# Altium PCB TMTGP.PcbDoc
Units mil, origin at the board's own origin, x right, y up, seen from the top; angles counter-clockwise.
Board outline 905 x 1625 mil, 2 copper layers (Top Layer, Bottom Layer); 61 components, 55 nets, 267 pads, 27 vias.
Unrouted connection lines stored in the file: 166.
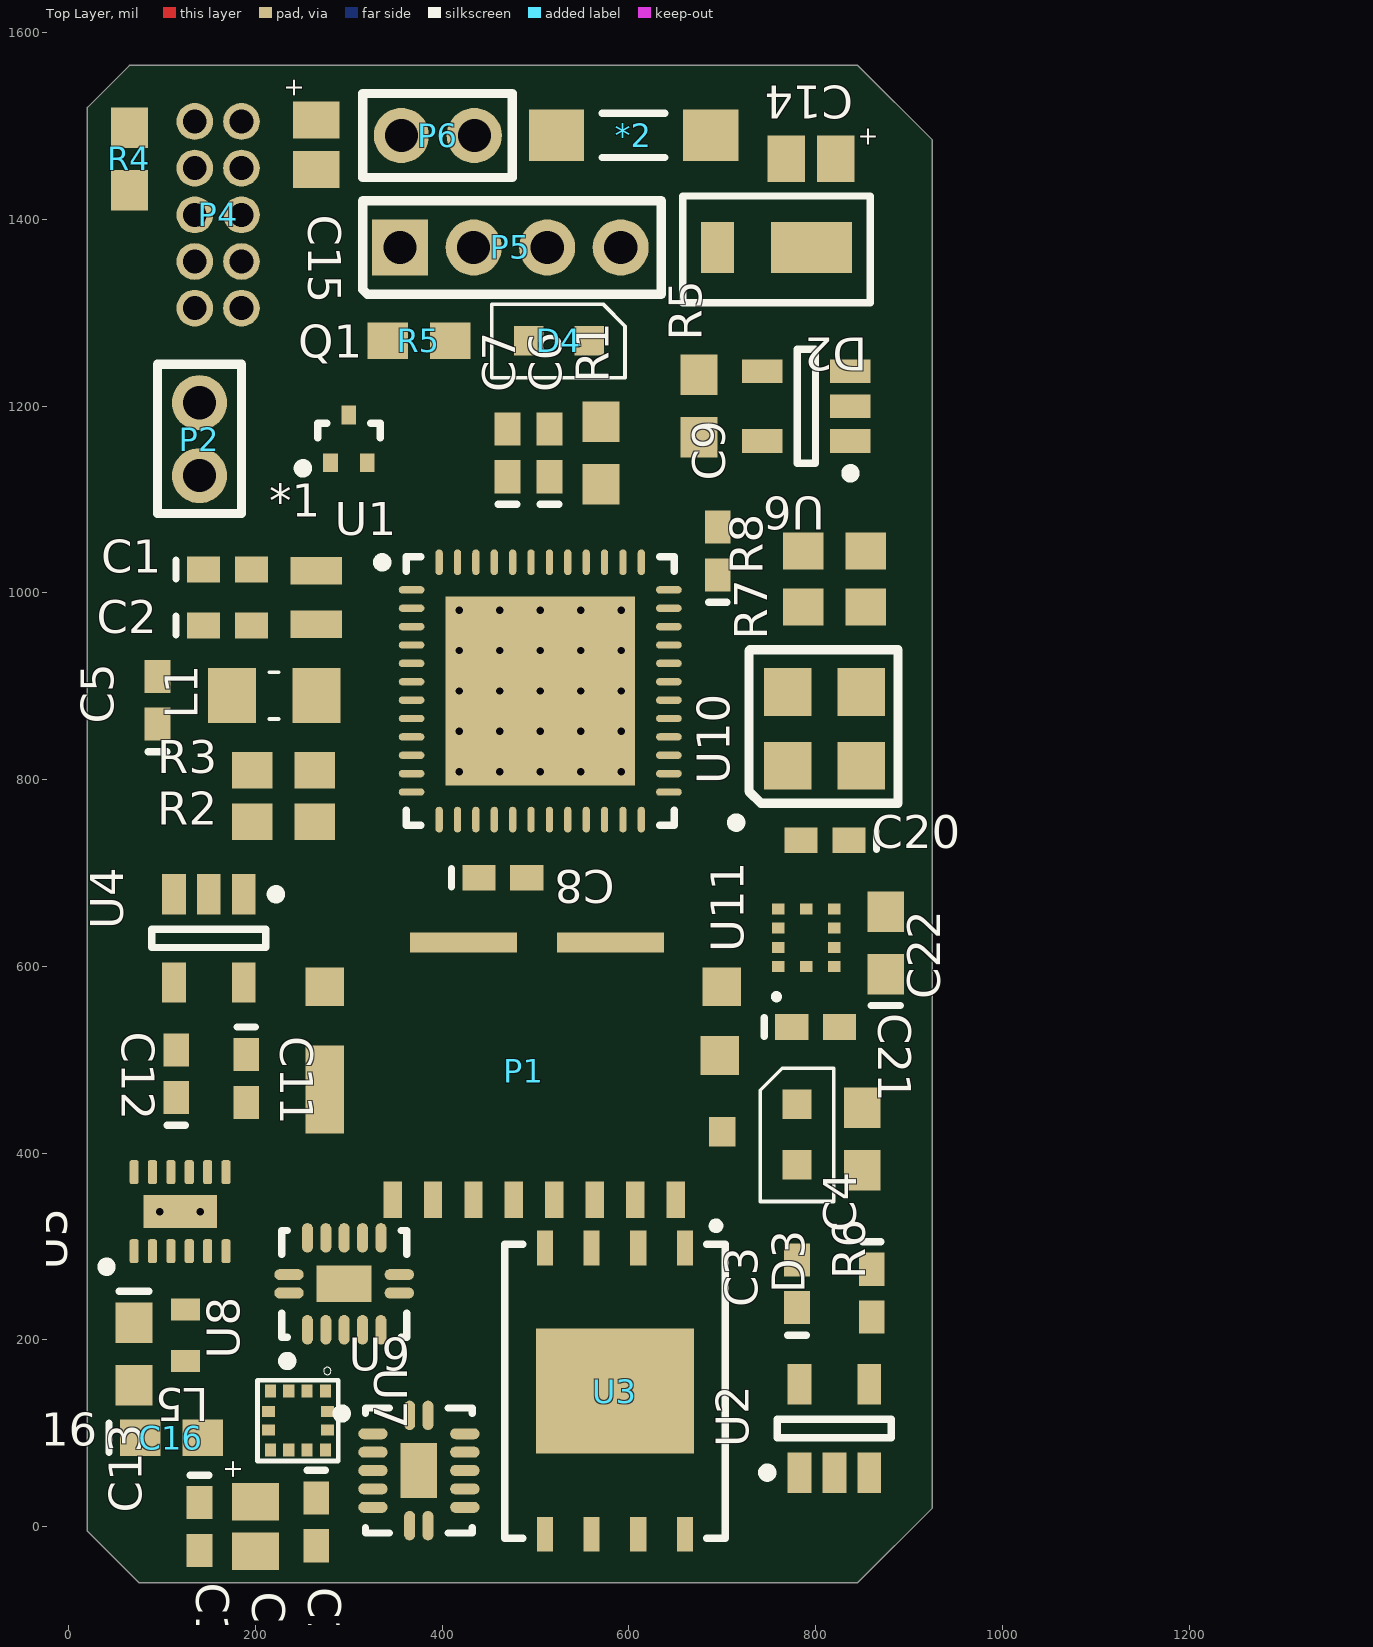
[diagram p0: Top Layer view]
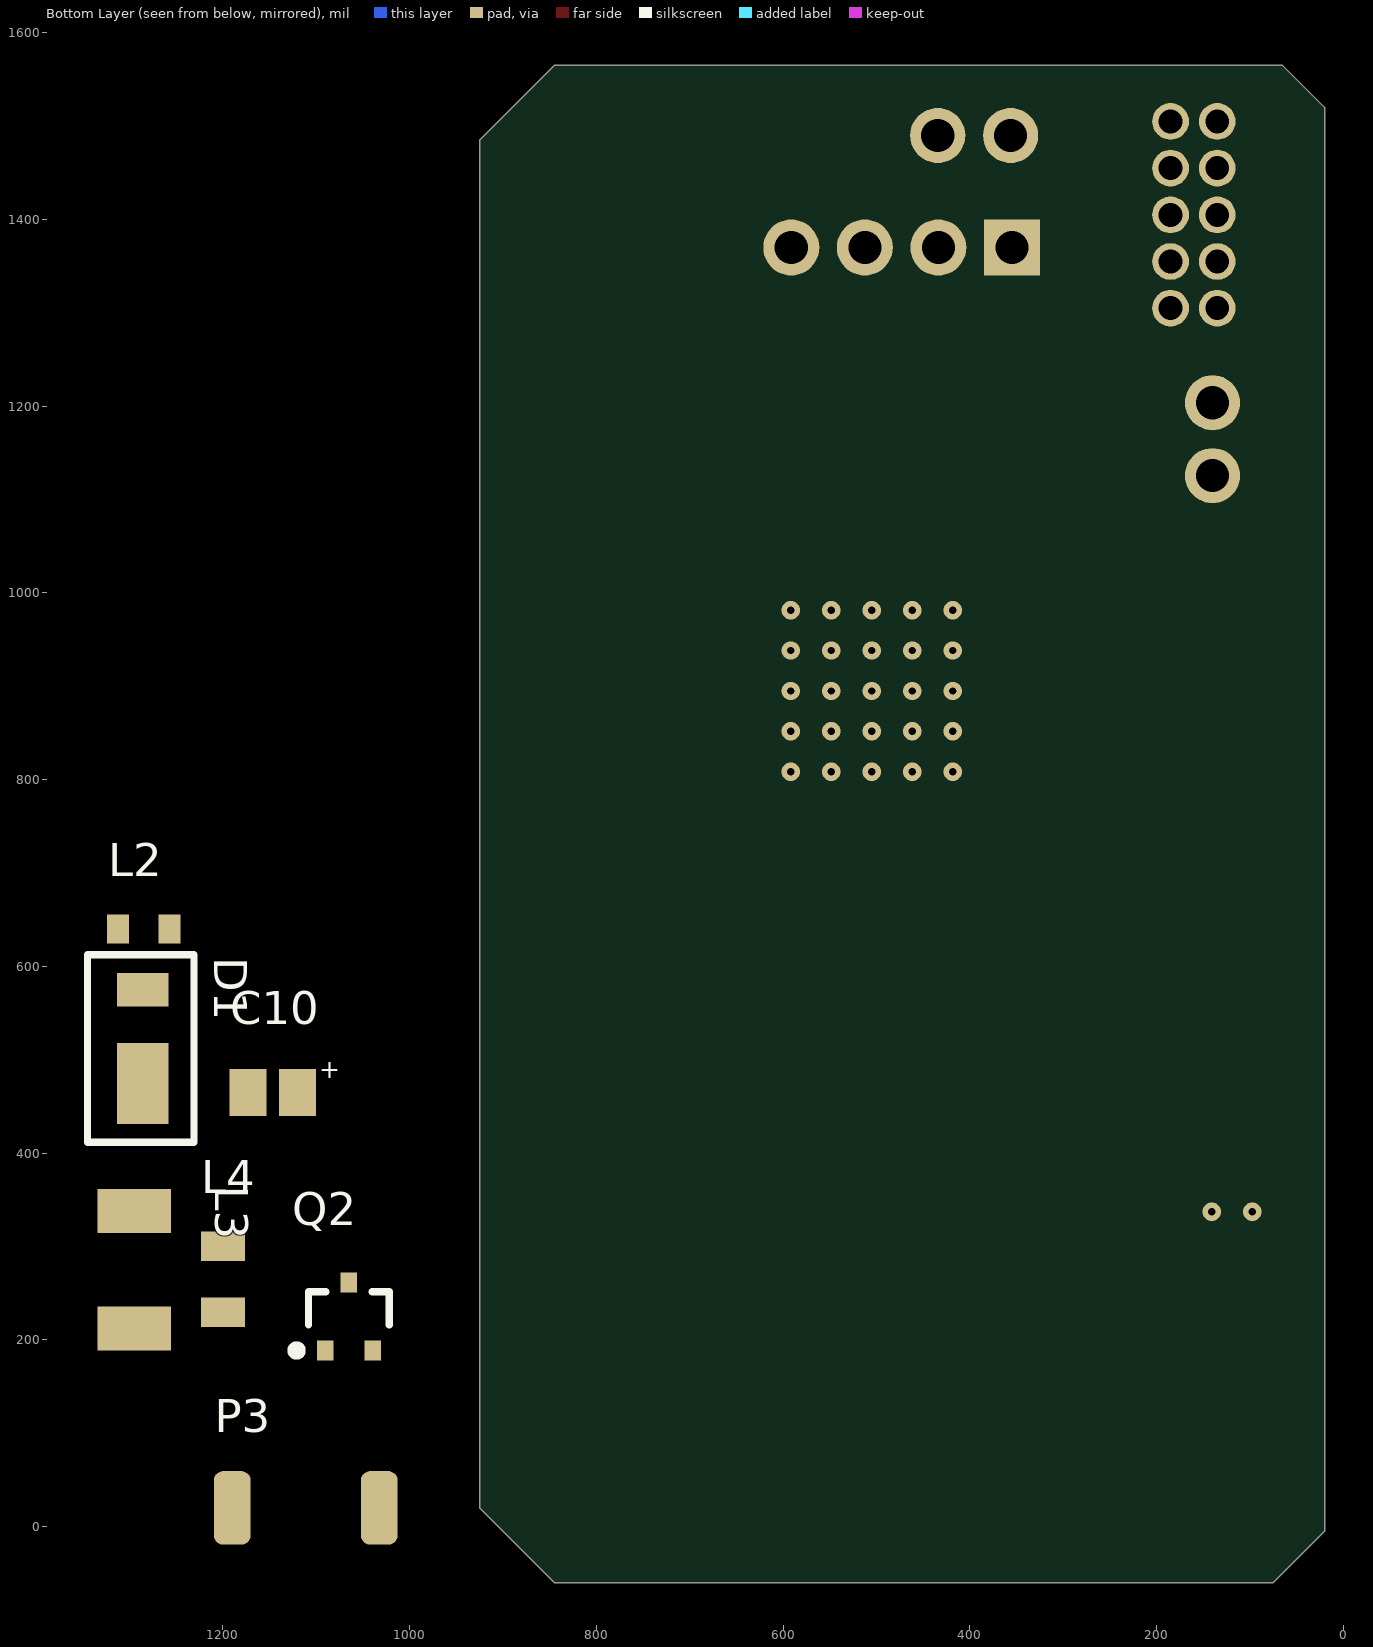
[diagram p1: Bottom Layer view, seen from below]

## Layer stack, top to bottom
Top Solder: solder mask 0.4, Solder Resist, Dk 3.5
Top Layer: signal copper 1.4
Dielectric 1: dielectric 12.6, FR-4, Dk 4.8
Bottom Layer: signal copper 1.4
Bottom Solder: solder mask 0.4, Solder Resist, Dk 3.5

## Board outline
20,-5 20,1520 65,1565 845,1565 925,1485 925,20 845,-60 75,-60

## Design rules (kind name [scope] priority, off if disabled: settings)
Clearance [All] p1: gap=10
PolygonConnect [All] p1: connectstyle=Relief reliefconductorwidth=10 reliefentries=4 polygonreliefangle="90 Angle" airgapwidth=10
RoomDefinition TMTGP_Sensors [InComponentClass('TMTGP_Sensors')] p1: confinementstyle=ConfineIn formatcopy=TRUE lockcomponents=FALSE outline -1180,-2185 820,-2185 820,-1185 -1180,-1185
RoomDefinition TMTGP [InComponentClass('TMTGP')] p2: confinementstyle=ConfineIn formatcopy=TRUE lockcomponents=FALSE outline -1180,-2185 820,-2185 820,-1185 -1180,-1185
RoutingVias [All] p1: holewidth=28 width=50 viastyle="Through Hole" minholewidth=28 minwidth=50 maxholewidth=28 maxwidth=50
SolderMaskExpansion [All] p1: expansion=4
Width [All] p1: maxlimit=10 minlimit=10 preferedwidth=10
29 further rules are at their usual default settings.

## Classes and differential pairs
component class TMTGP_Sensors: C17 C18 C19 C20 C21 C22 R7 R8 U7 U8 U9 U10 U11
component class TMTGP: *1 *2 C1 C2 C3 C4 C5 C6 C7 C8 C9 C10 C11 C12 C13 C14 C15 C16 D1 D2 D3 D4 L1 L2 L3 L4 L5 P1 P2 P3 P4 P5 P6 Q1 Q2 R1 R2 R3 R4 R5 R6 U1 U2 U3 U4 U5 U6

## Components (designator, comment, footprint, x,y, rotation, side; value= is the part's Value field where it differs from the comment)
*1 "XTAL_ABS06" XTAL-ABS06 265,995 r90 top
*2 "Reed_MK24" "Reed MK24-B-3" 605,1490 r0 top
C1 "22.5pF" 0402 170,1025 r0 top
C2 "22.5pF" 0402 170,965 r0 top
C3 "1.0uF" 0402 780,260 r90 top
C4 "10nF" 0402 860,250 r270 top
C5 "0.1uF" 0402 95,885 r90 top
C6 "0.1uF" 0402 515,1150 r90 top
C7 "0.1uF" 0402 470,1150 r90 top
C8 "0.1 uF" 0402 465,695 r0 top
C9 "0.1 uF" 0402 695,1045 r90 top
C10 "47uF" Tant0805 1146.56,465 r180 bottom
C11 "1.0uF" 0402 190,480 r270 top
C12 "10nF" 0402 115,485 r90 top
C13 "C0603" 0603 70,185 r270 top
C14 "1uF" Tant0805 795,1465 r0 top
C15 "1uF" Tant0805 265,1480 r90 top
C16 "C0603" 0603 110,95 r0 top
C17 "100nF" 0402 265,5 r270 top
C18 "10uF" Tant0805 200,0 r90 top
C19 "100nF" 0402 140,0 r270 top
C20 "0.1uF" 0402 810,735 r180 top
C21 "1.0uF" 0402 800,535 r0 top
C22 "C0603" 0603 875,625 r90 top
D1 "Shottky" DFLS130 1286.06,510 r90 bottom
D2 "Shottky" DFLS130 760,1370 r180 top
D3 "LED_0603" Diode0603 780,420 r90 top
D4 "LED_0603" Diode0603 525,1270 r0 top
L1 "300Ohm" "0805 (M2125) Ferrite" 220,890 r180 top
L2 "47uH" "Inductor KLZ1608AHR" 1285,640 r180 bottom
L3 "390uH" Inductor_NLV32T 1295,275 r90 bottom
L4 "22uH" "Inductor MLZ2012M220WT000" 1200,265 r270 bottom
L5 "2.2uH" "Inductor KLZ1608AHR" 125,205 r90 top
P1 "microSD" "Molex microSD" 650,350 r0 top
P2 "HDR_2x1_2mm" HDR_2x1_2mm 140,1125 r0 top
P3 "PIEZO" PIEZO 1190,20 r270 bottom
P4 "Cortex Debug" Header_2x5_50mil 135,1305 r0 top
P5 "HDR_4x1_2mm" Hdr_4x1_2mm 355,1370 r270 top
P6 "HDR_2x1_2mm" HDR_2x1_2mm 435,1490 r90 top
Q1 "DMN5L06TK-7" SOT-523 300,1165 r90 top
Q2 "PMF250XN,115" NXP-SOT323_N 1065,225 r90 bottom
R1 "10K" 3-0603 570,1150 r270 top
R2 "100k" 3-0603 230,755 r180 top
R3 "100k" 3-0603 230,810 r0 top
R4 "Do not place" 3-0603 65,1465 r90 top
R5 "2k" 3-0603 675,1200 r270 top
R5 "330X" 3-0603 375,1270 r0 top
R6 "330X" 3-0603 850,415 r270 top
R7 "4.7k" 3-0603 820,985 r180 top
R8 "4.7k" 3-0603 820,1045 r0 top
U1 "ATSAMD21GA-MUT" QFN127P600-8N 505,895 r0 top
U2 "LP3985IM5-3.3" MF05A_N 820,105 r90 top
U3 "W25Q256JVEIQ_TR" *SON127P800X600X80-9N 585,145 r270 top
U4 "LP3985IM5-3.3" MF05A_N 150,630 r270 top
U5 "TPS62740" TPS6274x 70,295 r90 top
U6 "MCP73831T-2DCI/OT" SOT-23-OT5_N 790,1200 r180 top
U7 "LIS2DS12" LGA-12 275,145 r270 top
U8 "Level Shifter" DHVQFN14 295,260 r90 top
U9 "Level Shifter" DHVQFN14 375,60 r0 top
U10 "MS5837" MS5837 770,815 r90 top
U11 "MMC33160MT" MMC33160MT 760,600 r90 top

## Footprints (in the part's own frame and the unit in brackets; to place one, negate y for a bottom-side part, rotate by r counter-clockwise, add the part's x,y. Pads: shape width x height; smd on the part's side, far side on the other; paste and mask are expansions set on the pad)
3-0603 [mm] "Chip Resistor; Body 1.6 x 0.9 mm (LxW typ)"
  rect 1.1x1 smd: 1(-0.85,0) 2(0.85,0)
0402 [mm] "Chip Capacitor; Body 1.0 x 0.5 mm (LxW typ)"
  rect 0.9x0.7 smd: 1(-0.65,0) 2(0.65,0)
  silkscreen extent -1.4,-0.25 -1.4,0.25
0603 [mm] "Chip Capacitor; Body 1.6 x 0.8 mm (LxW typ)"
  rect 1.1x1 smd: 1(-0.85,0) 2(0.85,0)
  silkscreen extent -1.7,-0.4 -1.7,0.4
"0805 (M2125) Ferrite" [mm] "Chip Resistor; Body 2.0 x 1.3 mm (LxW typ)"
  rect 1.3x1.5 smd: 1(-1.15,0) 2(1.15,0)
  silkscreen extent -0.13,-0.64 0.13,0.64, body extent -1.15,-0.72 1.15,0.73, height 0.81
*SON127P800X600X80-9N [mm]
  rect 0.94x0.44 smd: 1(-3.895,1.905) 2(-3.895,0.635) 3(-3.895,-0.635) 4(-3.895,-1.905) 5(3.895,-1.905) 6(3.895,-0.635) 7(3.895,0.635) 8(3.895,1.905)
  rect 3.4x4.3 smd: 9(0,0)
  silkscreen extent -4.6,-3 4,3
DFLS130 [mm] "Diode"
  rect 0.9x1.4 smd: A(1.65,0)
  rect 2.2x1.4 smd: K(-0.9,0)
  silkscreen extent -2.5,-1.4 2.6,1.5
DHVQFN14 [mm] "QFN, 14-Leads, Body 2.50x3.00mm, Pitch 0.50mm, Thermal Pad 1.00x1.50mm, IPC Medium Density"
  oval 0.3x0.8 smd: 1(-0.25,1.5) 7(-0.25,-1.5) 8(0.25,-1.5) 14(0.25,1.5)
  oval 0.8x0.3 smd: 2(-1.25,1) 3(-1.25,0.5) 4(-1.25,0) 5(-1.25,-0.5) 6(-1.25,-1) 9(1.25,-1) 10(1.25,-0.5) 11(1.25,0) 12(1.25,0.5) 13(1.25,1)
  rect 1x1.5 smd: 15(0,0)
  silkscreen extent -2.22,-1.7 1.45,1.7, body extent -1.3,-1.55 1.3,1.55, height 1
Diode0603 [mm]
  rect 0.8x0.8 smd: A(-0.825,0) K(0.825,0)
  silkscreen extent -1.83,-1 1.8,1
HDR_2x1_2mm [mm]
  round 1.5 hole 0.9: 1(0,0.016) 2(0,2)
  silkscreen extent -1.14,-1.02 1.14,3.05
Hdr_4x1_2mm [mil]
  rect 60x60 hole 35.43: 1(0,0)
  round 60 hole 35.43: 2(0,78.74) 3(0,157.48) 4(0,236.22)
  silkscreen extent -50,-40 50,280
Header_2x5_50mil [mm]
  round 1 hole 0.65: 1(0,0) 2(1.27,0) 3(0,1.27) 4(1.27,1.27) 5(0,2.54) 6(1.27,2.54) 7(0,3.81) 8(1.27,3.81) 9(0,5.08) 10(1.27,5.08)
"Inductor KLZ1608AHR" [mm]
  rect 0.6x0.8 smd: 1(-0.7,0) 2(0.7,0)
"Inductor MLZ2012M220WT000" [mm]
  rect 0.8x1.2 smd: 1(-0.9,0) 2(0.9,0)
Inductor_NLV32T [mm]
  rect 1.2x2 smd: 1(-1.6,0) 2(1.6,0)
LGA-12 [mm] "LIS2DS12"
  rect 0.35x0.3 smd: 1(0,0) 2(0,-0.5) 3(0,-1) 4(0,-1.5) 7(1.6,-1.5) 8(1.6,-1) 9(1.6,-0.5) 10(1.6,0)
  rect 0.3x0.35 smd: 5(0.55,-1.55) 6(1.05,-1.55) 11(1.05,0.05) 12(0.55,0.05)
  silkscreen extent -0.65,-1.85 1.9,0.35
MF05A_N [mm] "SOT23, 5-Leads, Body 2.9x1.6mm, Pitch 0.95mm, Lead Span 2.8mm, IPC Medium Density"
  rect 1.1x0.65 smd: 1(-1.2,0.95) 2(-1.2,0) 3(-1.2,-0.95) 4(1.2,-0.95) 5(1.2,0.95)
  silkscreen extent -1.32,-1.55 0.25,1.95, body extent -0.9,-1.55 0.9,1.55, height 1.19
MMC33160MT [mm] "Memsic magnetometer"
  rect 0.3x0.35 smd: 1(0,0) 2(0,-0.76) 3(0,-1.52) 4(0.52,-1.52) 5(1.04,-1.52) 6(1.56,-1.52) 7(1.56,-0.76) 8(1.56,0) 9(1.04,0) 10(0.52,0)
  silkscreen extent -0.85,0.03 -0.8,0.07
"Molex microSD" [mm] "wicked small microSD"
  rect 0.5x1 smd: 1(0,0) 2(-1.1,0) 3(-2.2,0) 4(-3.3,0) 5(-4.4,0) 6(-5.5,0) 7(-6.6,0) 8(-7.7,0)
  rect 1.05x2.4 smd: ""(-9.55,3)
  rect 1.05x1.05 smd: ""(-9.55,5.8) ""(1.2,3.925) ""(1.25,5.8)
  rect 2.91x0.55 smd: ""(-5.775,7) ""(-1.775,7)
  rect 0.72x0.8 smd: ""(1.275,1.85)
MS5837 [mm]
  rect 1.3x1.3 smd: 1(0,0) 2(0,-2) 3(2,-2) 4(2,0)
  silkscreen extent -1.67,-3 3.15,1.52
NXP-SOT323_N [mm] "SOT23, 3-Leads, Body 2.2x1.35mm, Pitch 0.65mm, IPC Medium Density"
  rect 0.55x0.45 smd: 1(-0.925,0.65) 2(-0.925,-0.65) 3(0.925,0)
  silkscreen extent -1.05,-1.1 0.67,1.55, body extent -0.67,-1.1 0.67,1.1, height 1.1
PIEZO [mm]
  rrect50% 2x1 smd: 1(0,0) 2(0,4)
QFN127P600-8N [mm]
  oval 0.7x0.2 smd: 1(-3.5,2.75) 2(-3.5,2.25) 3(-3.5,1.75) 4(-3.5,1.25) 5(-3.5,0.75) 6(-3.5,0.25) 7(-3.5,-0.25) 8(-3.5,-0.75) 9(-3.5,-1.25) 10(-3.5,-1.75) 11(-3.5,-2.25) 12(-3.5,-2.75) 25(3.5,-2.75) 26(3.5,-2.25) 27(3.5,-1.75) 28(3.5,-1.25) 29(3.5,-0.75) 30(3.5,-0.25) 31(3.5,0.25) 32(3.5,0.75) 33(3.5,1.25) 34(3.5,1.75) 35(3.5,2.25) 36(3.5,2.75)
  oval 0.2x0.7 smd: 13(-2.75,-3.5) 14(-2.25,-3.5) 15(-1.75,-3.5) 16(-1.25,-3.5) 17(-0.75,-3.5) 18(-0.25,-3.5) 19(0.25,-3.5) 20(0.75,-3.5) 21(1.25,-3.5) 22(1.75,-3.5) 23(2.25,-3.5) 24(2.75,-3.5) 37(2.75,3.5) 38(2.25,3.5) 39(1.75,3.5) 40(1.25,3.5) 41(0.75,3.5) 42(0.25,3.5) 43(-0.25,3.5) 44(-0.75,3.5) 45(-1.25,3.5) 46(-1.75,3.5) 47(-2.25,3.5) 48(-2.75,3.5)
  rect 5.15x5.15 smd: 49(0,0)
  silkscreen extent -4.42,-3.65 3.65,3.65, body extent -3.5,-3.5 3.5,3.5, height 0.85
"Reed MK24-B-3" [mm] "Meder Reed Switch Surface Mount"
  rect 1.5x1.4 smd: 1(-2.1,0) 2(2.1,0)
  silkscreen extent -0.85,-0.6 0.85,0.6, body extent -2.75,-1.1 2.75,1.1, height 1.8
SOT-23-OT5_N [mm] "SOT23, 5-Leads, Body 2.9x1.7mm, Pitch 0.95mm, Lead Span 2.8mm, IPC Medium Density"
  rect 1.1x0.65 smd: 1(-1.2,0.95) 2(-1.2,0) 3(-1.2,-0.95) 4(1.2,-0.95) 5(1.2,0.95)
  silkscreen extent -1.33,-1.55 0.25,1.95, body extent -0.9,-1.55 0.9,1.55, height 1.45
SOT-523 [mm] "For Diodes Inc MOSFET DMN5L06TK"
  rect 0.51x0.4 smd: 1(-0.65,0.5) 2(-0.65,-0.5) 3(0.65,0)
  silkscreen extent -0.92,-0.85 0.42,1.37, body extent -0.43,-0.85 0.42,0.85, height 0.8
Tant0805 [mil]
  rect 40x50 smd: 1(-26.5,0) 2(26.5,0)
TPS6274x [mm] "QFN, 12-Leads, Body 2.00x3.00mm, Pitch 0.50mm, Thermal Pad 0.90x2.00mm, IPC Medium Density"
  rrect50% 0.65x0.25 smd: 1(0,0) 2(0,-0.5) 3(0,-1) 4(0,-1.5) 5(0,-2) 6(0,-2.5) 7(2.15,-2.5) 8(2.15,-2) 9(2.15,-1.5) 10(2.15,-1) 11(2.15,-0.5) 12(2.15,0)
  rect 0.9x2 smd paste-0.1: 13(1.075,-1.25)
  silkscreen extent -0.55,0.63 -0.3,0.87, body extent 0.03,-2.8 2.12,0.3, height 0.8
XTAL-ABS06 [mm]
  rect 0.75x1.4 smd: 1(-0.725,0) 2(0.725,0)

## Part data
C1 C2 C3 C4 C5 C6 C7 C8 C9 C11 C12 C17 C19 C20 C21: library part C0402, "Ceramic Chip Capacitor - Standard"
C10 C14 C15 C18: library part Tant0805
C13 C16 C22: "Ceramic Chip Capacitor - Standard"
D1 D2: library part DFLS130
L1: library part "Ferrite 0805(M2125) 3A", "Ferrite 25mOhm@DC,  60 Ohm@100MHz"
L2 L5: library part "Inductor KLZ1608"
L3: library part Inductor_NLV32T
L4: library part "Inductor MLZ2012M220WT000"
P1: library part "microSD Molex tiny"
P4: library part CortexDebug
Q1: library part "FET DMN5L06TK-7", "Ultra-low leakage Enhanced MOSFET"
Q2: "N-Channel Trench MOSFET, 30 V, 0.9 A, -55 to 150 degC, 3-Pin SOT323, Tape and Reel"
R1 R2 R3 R4 R5 R5 R6 R7 R8: library part ERJ3RK, "Precision Thick Film Chip Resistor, 10 Ohm to 1M Ohm Range, 1% and 0.5% Tolerance, 0603 Size, 0.063 W"
U1: library part ATSAMD21G18
U2 U4: "Micropower, 150mA Low-Noise Ultra Low-Dropout CMOS Voltage Regulator, 5-pin SOT-23"
U3: "Ic Flash 256mbit 104mhz 8wson"
U5: library part TPS6274x
U6: "Miniature Single-Cell, Fully Integrated Li-Ion, Li-Polymer Charge Management Controller, 4.2V, 5-Pin SOT-23, Industrial Temperature, Tape and Reel"
U8 U9: library part NTB0104, "Voltage level translator"
U10: "Pressure/Temp"

## Via types
v1: diameter 19.68, hole 7.87, Top Layer to Bottom Layer, 27 vias

## Nets (pads, with @x,y where several pads share a name; then routed paths per layer and width w, separated by ;. In a path a pad name is that pad's centre, name@x,y a point inside that pad or via, vN(x,y) a via of type N, cw(c..) or ccw(c..) an arc to the next point about the centre after c; other vN are vias at no path point)
A4: R2.1 R3.2 U1.10
BURN: Q1.1 U1.47
BWIRE: P2.1 Q1.3
CS: P1.2 U1.27
CS2: U1.28 U3.1
CS_LIS: U8.11
CS_LIS_1.8: U7.2 U8.4
D+: P5.2 U1.34
D-: P5.3 U1.33
GND: C1.1 C2.1 C3.2 C4.1 C5.2 C6.2 C7.2 C8.2 C9.2 C10.1 C11.2 C12.1 C13.2 C14.1 C15.1 C16.1 C17.2 C18.1 C19.2 C20.2 C21.2 C22.1 P1.6 P4.5 P4.7 P5.1 P6.2 Q1.2 Q2.2 R3.1 R4.2 R5.1@675,1233.46 U1.5 U1.18 U1.35 U1.42 U2.2 U3.4 U4.2 U5.3 U5.4 U5.8 U5.9 U5.10 U5.11 U6.2 U7.6 U7.7 U7.8 U8.7 U9.7 U10.1 U11.10
HVDD: C10.2 D1.K L3.1 P3.1
INT1: U1.26 U9.13
INT1_1.8: U7.12 U9.2
INT2: U1.25 U9.12
INT2_1.8: U7.11 U9.3
LED1: D4.K U1.39
MISO: P1.7 U1.21 U3.2 U8.12
MISO_1.8: U7.3 U8.3
MOSI: P1.3 U1.19 U3.5 U8.13
MOSI_1.8: U7.4 U8.2
Net*1_1: *1.1 C2.2 U1.2
Net*1_2: *1.2 C1.2 U1.1
NetC4_2: C4.2 U2.4
NetC6_1: C6.1 U1.43
NetC12_2: C12.2 U4.4
NetC14_2: C14.2 D2.K R6.1 U6.4
NetC22_2: C22.2 U11.6
NetD1_A: D1.A L2.2
NetD3_A: D3.A R6.2
NetD3_K: D3.K U6.1
NetD4_A: D4.A R5.2@408.46,1270
NetL1_1: L1.1 U1.6
NetL3_2: L3.2 L4.1
NetL5_2: L5.2 U5.2
NetR5_2: R5.2@675,1166.54 U6.5
NetU11_4: U11.4 U11.5
O2POW: U1.13
PA20: U1.29
PA21: U1.30
PIEZO: L4.2 P3.2 Q2.3
PWM: Q2.1 U1.11
RESET: P4.2 R1.2 R4.1 U1.40
SCK: P1.5 U1.20 U3.6 U8.10
SCK_1.8: U7.1 U8.5
SCL: R8.1 U1.32 U10.3 U11.7
SD_POW: U1.48 U2.3
SD_VCC: C3.1 P1.4 U2.5
SDA: R7.2 U1.31 U10.4 U11.9
SWCLK: P4.8 U1.45
SWDIO: P4.10 U1.46
V1.8: C16.2 C17.1 C18.2 C19.1 L5.1 U5.5 U7.9 U7.10 U8.1 U9.1
V_BATT: *2.1 C15.2 P6.1 U6.3
VBUS: D2.A P5.4
VCC: C5.1 C7.1 C8.1 C9.1 C11.1 C20.1 C21.1 L1.2 P4.9 R1.1 R5.1@341.54,1270 R7.1 R8.2 U1.17 U1.36 U1.44 U3.3 U3.7 U3.8 U4.5 U8.8 U8.14 U9.8 U9.14 U10.2 U11.1 U11.8
VIN: *2.2 C13.1 L2.1 P2.2 R2.2 U2.1 U4.1 U4.3 U5.1 U5.12
pads on no net: P1. P1.1 P1.8 P4.1 P4.3 P4.4 P4.6 U1.3 U1.4 U1.7 U1.8 U1.9 U1.12 U1.14 U1.15 U1.16 U1.22 U1.23 U1.24 U1.37 U1.38 U1.41 U1.49 U3.9 U5.6 U5.7 U5.13 U7.5 U8.6 U8.9 U8.15 U9.4 U9.5 U9.6 U9.9 U9.10 U9.11 U9.15 U11.2 U11.3
copper on no net:
  other v1: 97.56,337.32 140.87,337.32 418.39,808.39 461.69,808.39 505,808.39 548.31,808.39 591.61,808.39 418.39,851.69 461.69,851.69 505,851.69 548.31,851.69 591.61,851.69 418.39,895 461.69,895 505,895 548.31,895 591.61,895 418.39,938.31 461.69,938.31 505,938.31 548.31,938.31 591.61,938.31 418.39,981.61 461.69,981.61 505,981.61 548.31,981.61 591.61,981.61

## Silkscreen, mask and mechanical layers (free items; w line width, h text height)
Mechanical 1:
  the board outline again, w10

## Text inside footprints (layer, text, board x,y; h text height)
C10: Bottom Overlay "+" at 1096.56,480 h19.68
C14: Top Overlay "+" at 845,1480 h19.68
C15: Top Overlay "+" at 250,1530 h19.68 r90
C18: Top Overlay "+" at 185,50 h19.68 r90